# Altium PCB STM8_Project_rev_1.PcbDoc
Units mm, origin at the board's own origin, x right, y up, seen from the top; angles counter-clockwise.
Board outline 50 x 40 mm, 2 copper layers (Top Layer, Bottom Layer); 39 components, 29 nets, 126 pads, 10 vias.
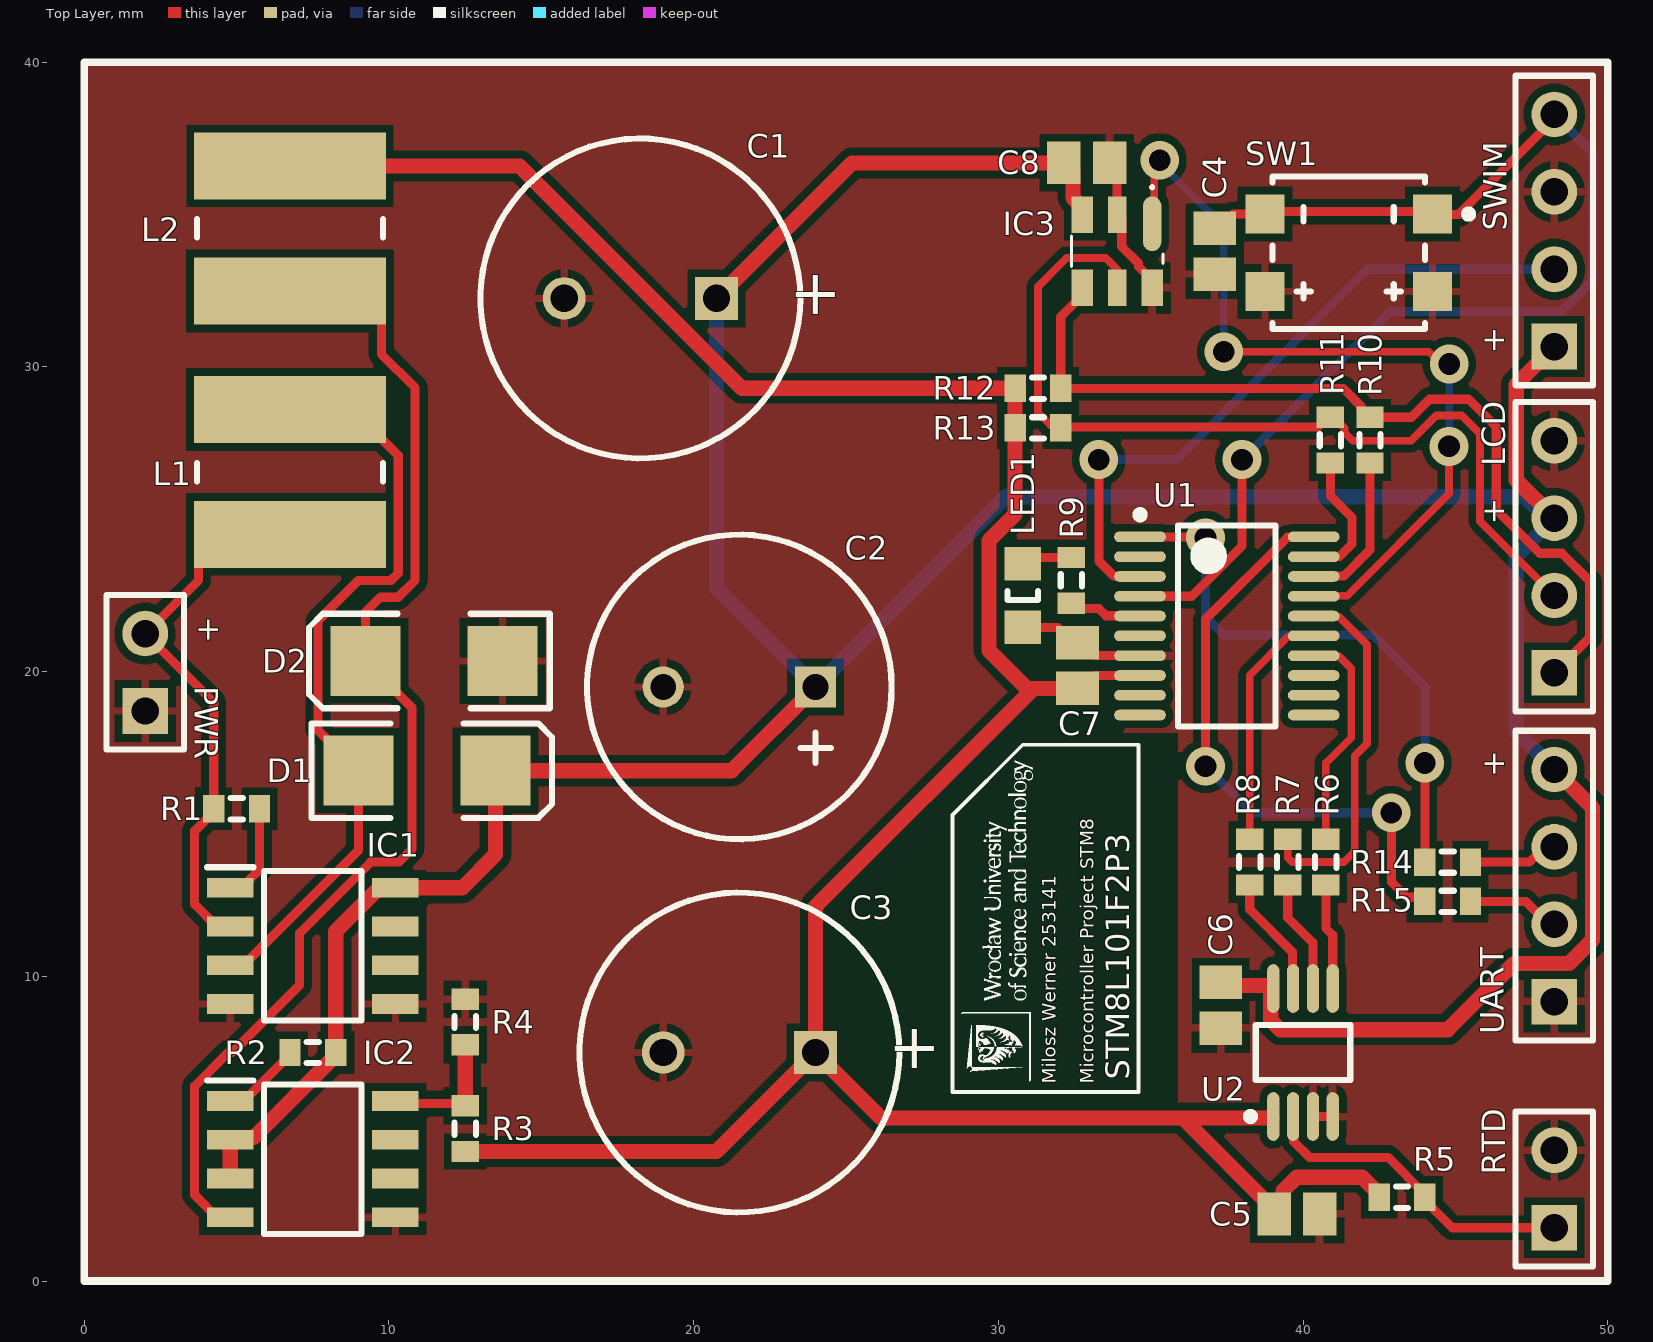
[diagram p0: Top Layer view]
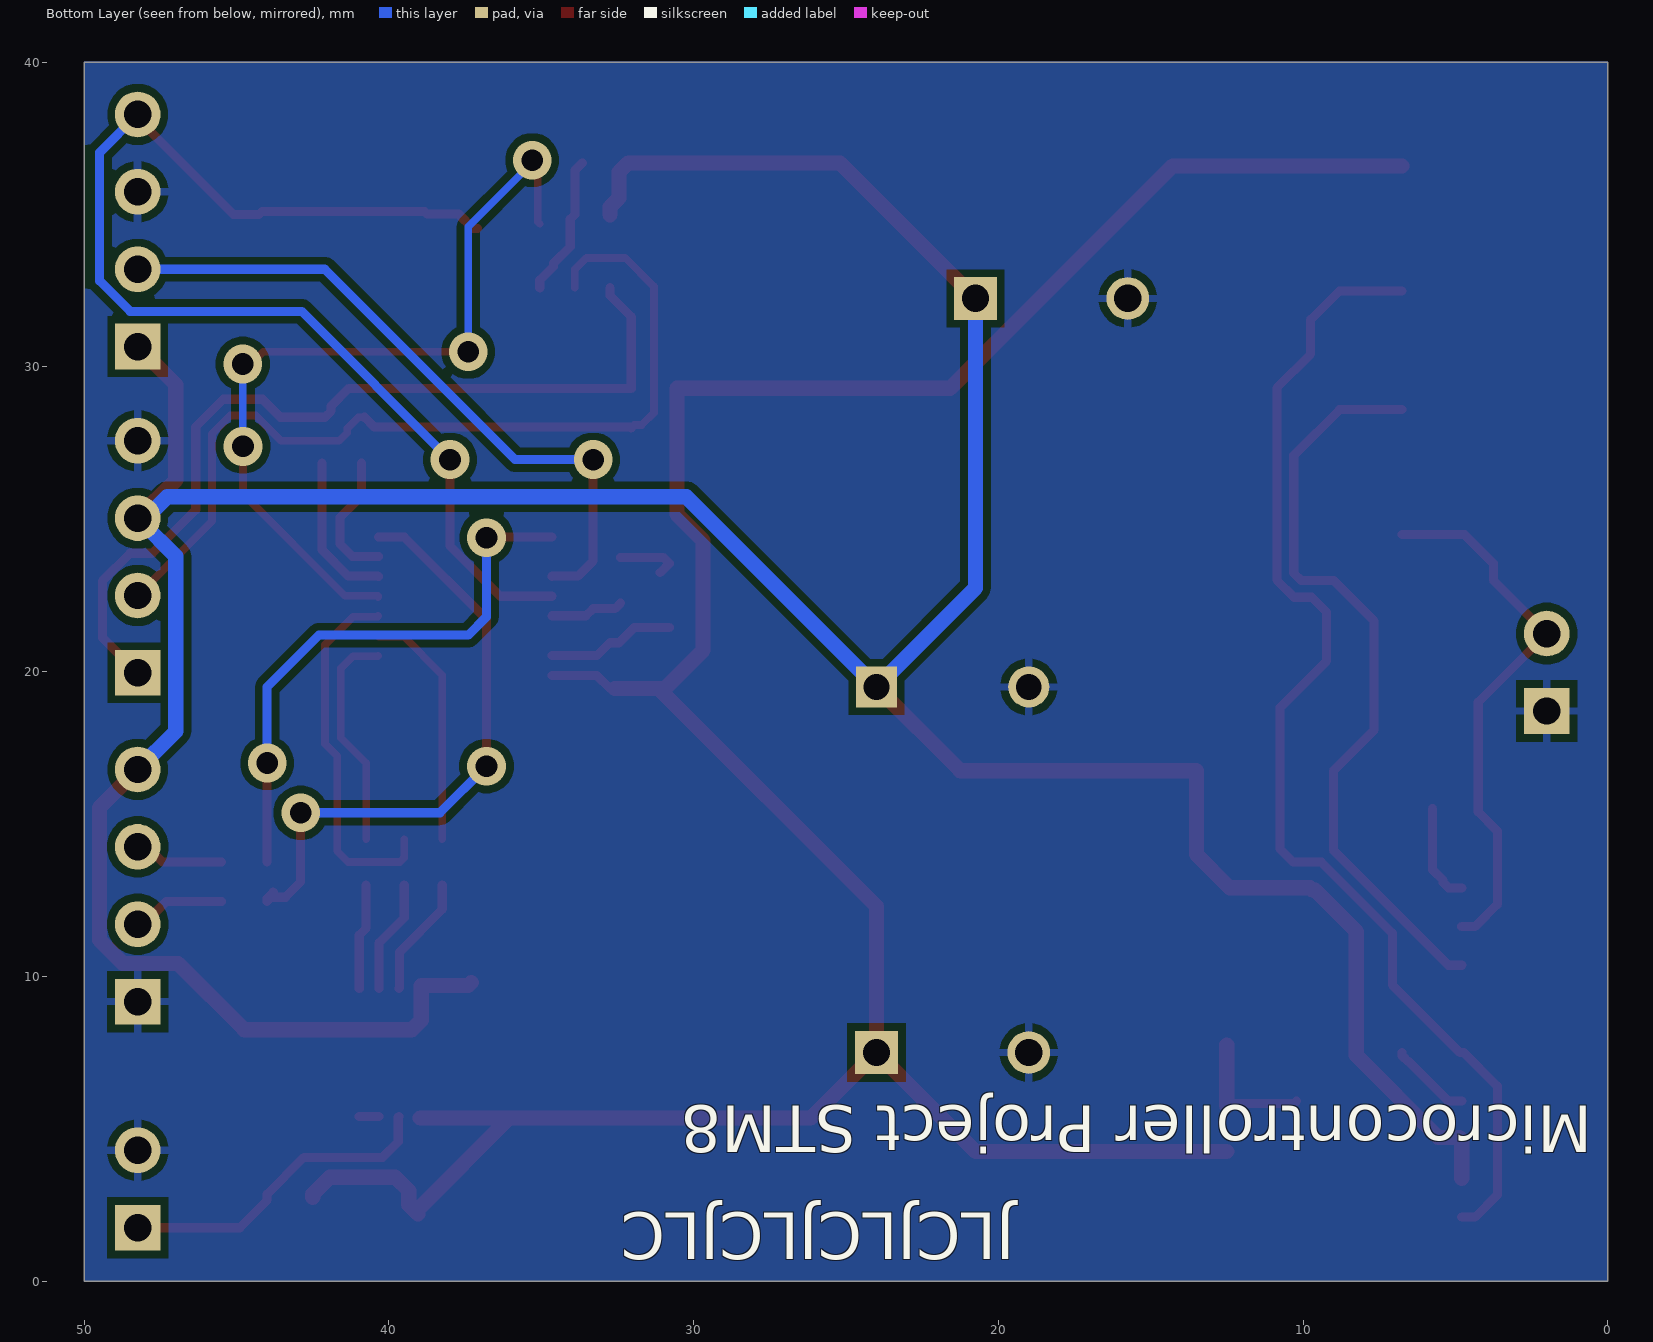
[diagram p1: Bottom Layer view, seen from below]

## Layer stack, top to bottom
Top Solder: solder mask 0.0102, Solder Resist, Dk 3.5
Top Layer: signal copper 0.0356
Dielectric 1: dielectric 0.32, FR-4, Dk 4.8
Bottom Layer: signal copper 0.0356
Bottom Solder: solder mask 0.0102, Solder Resist, Dk 3.5

## Board outline
0,0 0,40 50,40 50,0

## Design rules (kind name [scope] priority, off if disabled: settings)
Clearance [All] p1: gap=0.254 ignorepadtopadclearanceinfootprint=FALSE except(0: Arc-Hole Track-Hole SMDPad-Hole THPad-Hole Via-Hole Fill-Hole Poly-Hole Region-Hole Text-Hole)
PolygonConnect [All] p1: connectstyle=Relief reliefconductorwidth=0.254 reliefentries=4 polygonreliefangle="90 Angle" airgapwidth=0.254
RoutingVias [All] p1: holewidth=0.711 width=1.27 viastyle="Through Hole" minholewidth=0.711 minwidth=1.27 maxholewidth=0.711 maxwidth=1.27
SolderMaskExpansion [All] p1: expansion=0.102 istentingtop=FALSE
Width [All] p1: maxlimit=0.5 minlimit=0.254 preferedwidth=0.3
30 further rules are at their usual default settings.

## Classes and differential pairs
component class STM8_Project_ver_1: C1 C3 C4 C5 C6 C7 C8 D1 D2 IC1 IC2 IC3 L1 L2 LCD LED1 R1 R2 R3 R4 R5 R6 R7 R8 R9 R10 R11 R12 R13 R14 R15 RTD SW1 SWIM U1 U2

## Components (designator, comment, footprint, x,y, rotation, side; value= is the part's Value field where it differs from the comment)
C1 "EEU-FR1C102B" PNSC-EEUFM1H221-2 18.25,32.25 r180 top
C2 "UVC2G100MPD1TD" NIC-UVC2G100MPD1TD-2_V 21.5,19.5 r180 top
C3 "EEU-FR1C102B" PNSC-EEUFM1H221-2 21.5,7.5 r180 top
C4 "0805" C0805 37.1,33.8 r270 top value=100pF
C5 "0805" C0805 39.8,2.2 r0 top value=0.1uF
C6 "0805" C0805 37.3,9.05 r90 top value=1uF
C7 "0805" C0805 32.6,20.2 r90 top value=1uF
C8 "0805" C0805 32.9,36.7 r0 top value=1uF
D1 "SS13-LTP" SMB 11.25,16.75 r0 top
D2 "SS13-LTP" SMB 11.475,20.35 r180 top
IC1 "LT1110CS8-5#PBF" SOIC127P599X175-8N 7.5,11 r0 top
IC2 "LT1110CS8#PBF" SOIC127P599X175-8N 7.5,4 r0 top
IC3 "MXC6244AU" MXC6244AU 33.9,33.8 r270 top
L1 "744053470" WE-TPC-5828-LH 6.75,26.55 r90 top
L2 "744053470" WE-TPC-5828-LH 6.75,34.55 r90 top
LCD "Header 4 (LCD)" HDR1X4 48.25,19.96 r90 top (schematic designator P4)
LED1 "0805 RED" 0805_A 30.8,22.5 r90 top
PWR "Header 2" HDR1X2 2,18.71 r90 top (schematic designator P1)
R1 "0603" J1-0603 5,15.5 r0 top value="220 1%"
R2 "0603" J1-0603 7.5,7.5 r180 top value="220 1%"
R3 "0603" J1-0603 12.5,5 r270 top value=1.5K
R4 "0603" J1-0603 12.5,8.5 r90 top value=180
R5 "0603" J1-0603 43.25,2.75 r180 top value=10K
R6 "0603" J1-0603 40.75,13.75 r90 top value=1K
R7 "0603" J1-0603 39.5,13.75 r90 top value=1K
R8 "0603" J1-0603 38.25,13.75 r90 top value=1K
R9 "0603" J1-0603 32.4,23 r270 top value=1K
R10 "0603" J1-0603 42.2,27.6 r90 top value=1K
R11 "0603" J1-0603 40.9,27.6 r90 top value=1K
R12 "0603" J1-0603 31.3,29.3 r180 top value=4.7K
R13 "0603" J1-0603 31.3,28 r180 top value=4.7K
R14 "0603" J1-0603 44.75,13.75 r180 top value=1K
R15 "0603" J1-0603 44.75,12.46 r180 top value=1K
RTD "Header 2 (RTD)" HDR1X2 48.25,1.75 r90 top (schematic designator P2)
SW1 "7914G-1-000E" BOUR-7914G-1-000E_V 41.5,33.75 r270 top
SWIM "Header 4 (SWIM)" HDR1X4 48.25,30.67 r90 top (schematic designator P5)
U1 "STM8L101F2P3" TSSOP20_N 37.5,21.5 r0 top
U2 "ADS7816EB/250" TI-DGK8_N 40,7.5 r90 top
UART "Header 4 (UART)" HDR1X4 48.25,9.17 r90 top (schematic designator P3)

## Footprints (in the part's own frame and the unit in brackets; to place one, negate y for a bottom-side part, rotate by r counter-clockwise, add the part's x,y. Pads: shape width x height; smd on the part's side, far side on the other; paste and mask are expansions set on the pad)
0805_A [mm] "Chip LED, 2-Leads, Body 2.0x1.3mm, IPC Medium Density"
  rect 1.1x1.2 smd: 1(-1.05,0) 2(1.05,0)
  silkscreen extent -0.15,-0.5 0.15,0.5, body extent -1,-0.62 1,0.63, height 0.68
BOUR-7914G-1-000E_V [mm] "SMD, 4-Leads, Body 5x5mm, Height 4.49mm"
  rect 1.27x1.27 smd: 1(-1.27,2.75) 2(1.27,2.75) 3(1.27,-2.75) 4(-1.27,-2.75)
  silkscreen extent -2.5,-2.5 2.5,4.06, body extent -2.5,-3.1 2.5,3.1, height 4.11
C0805 [mm] "Chip Capacitor, Body 2.0x1.3mm, IPC High Density"
  rect 1.1x1.4 smd: 1(-0.75,0) 2(0.75,0)
  body extent -1.1,-0.72 1.1,0.72, height 1.4
HDR1X2 [mm] "Connector; Header; 2 Position"
  rect 1.5x1.5 hole 0.9: 1(0,0)
  round 1.5 hole 0.9: 2(2.54,0)
  silkscreen extent -1.27,-1.27 3.81,1.27
HDR1X4 [mm] "Connector; Header; 4 Position"
  rect 1.5x1.5 hole 0.9: 1(0,0)
  round 1.5 hole 0.9: 2(2.54,0) 3(5.08,0) 4(7.62,0)
  silkscreen extent -1.27,-1.27 8.89,1.27
J1-0603 [mm] "Chip Resistor, Body 1.6x0.8mm, IPC High Density"
  rect 0.7x0.9 smd: 1(-0.75,0) 2(0.75,0)
  silkscreen extent -0.2,-0.35 0.2,0.35, body extent -0.85,-0.48 0.85,0.48, height 0.9
MXC6244AU [mm]
  rrect100% 1.8x0.6 smd: 1(-0.9,1.15)
  rect 1.2x0.6 smd: 2(-1.2,0) 5(1.2,0)
  rect 1.2x0.7 smd: 3(-1.2,-1.15) 4(1.2,-1.15) 6(1.2,1.15)
  silkscreen extent -2.15,-1.5 0.5,1.5, body extent -1.5,-1.5 1.5,1.5, height 1.4
NIC-UVC2G100MPD1TD-2_V [mm] "2-Leads, Radial Lead 10x14.5mm,Lead-wire Diameter 0.6mm, Pin Spacing 5mm"
  rect 1.35x1.35 hole 0.85: 1(-2.5,0)
  round 1.35 hole 0.85: 2(2.5,0)
  silkscreen extent -5,-5 5,5, body extent -5,-5 5,5, height 14.5
PNSC-EEUFM1H221-2 [mm] "THD, 2-Leads, Dia 10.5mm, Body Length 17.5mm, Pin Spacing 5mm"
  rect 1.4x1.4 hole 0.9: 1(-2.5,0)
  round 1.4 hole 0.9: 2(2.5,0)
  silkscreen extent -5.25,-5.25 5.25,5.25, body extent -5.25,-5.25 5.25,5.25, height 17.5
SMB [mm] "DO-214-AA/SMB; 2 C-Bend Leads; Body 5.3 x 3.6 mm, inc. leads (LxW)"
  rect 2.3x2.3 smd: 1(-2.25,0) 2(2.25,0)
  silkscreen extent -3.8,-1.55 4.1,1.55
SOIC127P599X175-8N [mm]
  rect 1.526x0.65 smd: 1(-2.712,1.905) 2(-2.712,0.635) 3(-2.712,-0.635) 4(-2.712,-1.905) 5(2.712,-1.905) 6(2.712,-0.635) 7(2.712,0.635) 8(2.712,1.905)
  silkscreen extent -3.47,-2.45 1.6,2.58, body extent -3,-2.45 3,2.45, height 1.75
TI-DGK8_N [mm] "SOP, 8-Leads, Body 3x3mm, Pitch 0.65mm, IPC Medium Density"
  oval 1.6x0.4 smd: 1(-2.1,0.975) 2(-2.1,0.325) 3(-2.1,-0.325) 4(-2.1,-0.975) 5(2.1,-0.975) 6(2.1,-0.325) 7(2.1,0.325) 8(2.1,0.975)
  silkscreen extent -2.22,-1.55 0.9,1.85, body extent -1.55,-1.55 1.55,1.55, height 1.1
TSSOP20_N [mm] "TSOP, 20-Leads, Body 6.5x4.4mm, Pitch 0.65mm, IPC Medium Density"
  oval 1.7x0.35 smd: 1(-2.85,2.925) 2(-2.85,2.275) 3(-2.85,1.625) 4(-2.85,0.975) 5(-2.85,0.325) 6(-2.85,-0.325) 7(-2.85,-0.975) 8(-2.85,-1.625) 9(-2.85,-2.275) 10(-2.85,-2.925) 11(2.85,-2.925) 12(2.85,-2.275) 13(2.85,-1.625) 14(2.85,-0.975) 15(2.85,-0.325) 16(2.85,0.325) 17(2.85,0.975) 18(2.85,1.625) 19(2.85,2.275) 20(2.85,2.925)
  silkscreen extent -2.97,-3.3 1.6,3.77, body extent -2.25,-3.3 2.25,3.3, height 1.2
WE-TPC-5828-LH [mm] "SMD Inductor, 2-Leads, Body 5.8 x 5.8 mm"
  rect 2.2x6.3 smd: 1(-2.05,0) 2(2.05,0)
  silkscreen extent -0.3,-3.05 0.3,3.05, body extent -2.9,-2.9 2.9,2.9, height 2.79

## Part data
C1 C3: library part CMP-2000-05313-1, "Aluminum Electrolytic Capacitor, 1000 uF, +/- 20%, 16 V, -40 to 105 degC, 2-Pin THD, RoHS, Tape and Reel", Capacitance=1000µF, Case Size/Dimension=Ø10x16mm, Lifetime@Temperature=8000Hrs@105degC, Manufacturer=Panasonic, Operating Temp Range=-40to+105degC, Operating Temp-Max=105degC, Rated Voltage=16V, Ripple Current=1790mA, Datasheet URL=http://www.produktinfo.conrad.com/datenblaetter/425000-449999/446746-da-01-en-ALU_KONDENSATOR_FR_R_1000_UF_16V.pdf, Datasheet Version=Nov-11, Impedance=0.028O, Manufacturer URL=http://www.panasonic.com/, Series=FR, Type=Radial
C2: library part CMP-0743-00001-1, "Aluminum Electrolytic Capacitor, High Voltage, Ultra-Miniature-Sized for adapters, Polar, 400 V, 10uF, +/-20% Tolerance, -40 to 105 degC, 10 x 12.5 mm D X L, RoHS, Bulk", Capacitance Tolerance="+/- 20%", Category Temperature Range="-40 to 105 degC", Leakage Current (Short Term)="260 mA", Manufacturer=Nichicon, Rated Capacitance Range="10 uF", Rated Ripple Current (at 100kHz)="150 mA", Rated Ripple Current (at 120Hz)="100 mA", Rated Voltage="400 V", ComponentLink1Description="Manufacturer URL", ComponentLink1URL=http://www.nichicon.co.jp/, ComponentLink2Description=Datasheet, ComponentLink2URL=http://nichicon-us.com/english/products/pdfs/e-vc.pdf, ComponentLink3Description="Package Specification", ComponentLink3URL=http://nichicon-us.com/english/products/pdfs/e-vc.pdf, DatasheetVersion=Sep-13, Diameter="10 mm", Length="12.5 mm", Mounting Technology="Through Hole", PackageDescription="2-Pin Radial Lead 10 x 12.5 mm, Lead-wire Diameter 0.6 mm, Pin Spacing 5 mm", PackageReference=UVC2G100MPD1TD-2, PackageVersion=Sep-13, Packing=Bulk, PartNumber=UVC2G100MPD1TD, RoHS=TRUE, Series=VC
C4 C5 C6 C7 C8: library part Cap, "Capacitor", LatestRevisionDate=17-Jul-2002, LatestRevisionNote="Re-released for DXP Platform.", PackageDescription="Radial Cap, Thru-Hole; 2 Leads; 0.3 in Pin Spacing", PackageReference=RAD-0.3, Published=8-Jun-2000, Publisher="Altium Limited"
D1 D2: library part "D Schottky", "Schottky Diode", Code_JEDEC=DO-214-AA, LatestRevisionDate=17-Jul-2002, LatestRevisionNote="Re-released for DXP Platform.", PackageDescription="DO-214-AA/SMB; 2 C-Bend Leads; Body 5.3 x 3.6 mm, inc. leads (LxW)", PackageReference=SMB, Published=8-Jun-2000, Publisher="Altium Limited"
IC1: "Switching Voltage Regulators Micropower DC-DC Converter Fixed 5V", Manufacturer_Name="Linear Technology", Supplier Part Number 1=584-LT1110CS8-5#PBF, Datasheet Link=https://www.analog.com/media/en/technical-documentation/data-sheets/lt1110.pdf, Height=1.752mm, Manufacturer_Part_Number=LT1110CS8-5#PBF, Supplier 1=Mouser
IC2: "Switching Voltage Regulators Micropower DC-DC Converter Adjustable and Fixed 5V, 12V", Manufacturer_Name="Linear Technology", Mouser Part Number=584-LT1110CS8#PBF, Datasheet Link=https://www.analog.com/media/en/technical-documentation/data-sheets/lt1110.pdf, Height=1.752mm, Manufacturer_Part_Number=LT1110CS8#PBF, Mouser Price/Stock=https://www.mouser.com/Search/Refine.aspx?Keyword=584-LT1110CS8%23PBF, Supplier 1=Mouser, Supplier Part Number 1=584-LT1110CS8#PBF
IC3: "Accelerometers +/- 8g Complete 2 Axis Accelerometer System with Programmable Internal anti-vibration Filter", Manufacturer_Name=MEMSIC, Mouser Part Number=438-MXC6244AU, Datasheet Link=https://componentsearchengine.com/Datasheets/1/MXC6244AU.pdf, Height=1.3mm, Manufacturer_Part_Number=MXC6244AU, Mouser Price/Stock=https://www.mouser.co.uk/ProductDetail/MEMSIC/MXC6244AU?qs=uBbGm2YIKJILg44aLNvpFw%3D%3D, Supplier 1=Mouser, Supplier Part Number 1=438-MXC6244AU
L1 L2: library part CMP-0227-00413-1, "SMD Shielded Tiny Power Inductor WE-TPC, L = 47.0 µH", Inductance="47.0 ÂµH", ComponentLink1Description="Manufacturer Link", ComponentLink1URL=http://www.we-online.com, ComponentLink2Description=Datasheet, ComponentLink2URL=http://www.we-online.de/katalog/media/pdf/744053470.pdf, DatasheetVersion="ver 6, Aug-2010", PackageDescription="SMD Inductor, 2-Leads, Body 5.8 x 5.8 mm", PackageReference=WE-TPC-5828-LH, PackageVersion=2010
LCD SWIM UART: library part "Header 4", "Header, 4-Pin", LatestRevisionDate=17-Jul-2002, LatestRevisionNote="Re-released for DXP Platform.", Publisher="Altium Limited"
LED1: library part CMP-1426-00010-1, "SMD mono-color Chip LED, WL-SMCW, Super Red", Color="Super Red", Manufacturer="Wuerth Elektronik", PartNumber=150080SS75000, ComponentLink1Description="Manufacturer URL", ComponentLink1URL=http://www.we-online.com, ComponentLink2Description=Datasheet, ComponentLink2URL=http://katalog.we-online.com/led/datasheet/150080SS75000.pdf, PackageReference=0805_A
PWR: "Header, 2-Pin", LatestRevisionDate=17-Jul-2002, LatestRevisionNote="Re-released for DXP Platform.", Publisher="Altium Limited"
R1 R2 R3 R4 R5 R6 R7 R8 R9 R10 R11 R12 R13 R14 R15: library part Res3, "Resistor", LatestRevisionDate=29-May-2009, LatestRevisionNote="IPC-7351 Footprint Added.", PackageDescription="Chip Resistor", PackageReference=J1-0603, Published=8-Jun-2000, Publisher="Altium Limited"
RTD: library part "Header 2", "Header, 2-Pin", LatestRevisionDate=17-Jul-2002, LatestRevisionNote="Re-released for DXP Platform.", Publisher="Altium Limited"
SW1: library part CMP-2000-05692-1, "SPST Gull Wing Sealed Key Switch, 100 mA, 16 V, -55 to 125 degC, 4-Pin SMD, RoHS, Tape and Reel", Actuator Color=N/A, Contact Rating @ Voltage=0.1A, Dielectric Strength=250VAC, Manufacturer=Bourns, Maximum AC Voltage Rating=16V, Maximum Contact Resistance=100mOhm, Minimum Insulation Resistance=100MOhm, Operating Force=2.94N, Operating Temperature=-55to125C, Package Description="4-Pin Surface Mount Device, Body 5 x 5 mm, Height 4.49 mm", Actuator Length=1.65mm, Actuator Style=RoundButton, Base Material=Thermoplastic, Body Orientation=Straight, Contact Material=Gold, Contact Plating=N/A, COO=TW, Datasheet URL=http://www.bourns.com/docs/Product-Datasheets/7914.pdf, Datasheet Version=08/2016, Dimension=5x6.2x4.19mm, ECCN=EAR99, Electrical Life=N/A, Family=7914, Ground Terminal=No, Housing Material=N/A, HTS=8536509065, Illumination Type=N/R, Manufacturer URL=http://www.bourns.com/, Maximum DC Voltage Rating=16V, Mechanical Life=100000Cycles, Mounting=SurfaceMount,GullWing, Mounting Technology=SurfaceMount, Package Reference=7914G-1-000E, Packaging=EmbossedTapeandReel, Part No=7914G-1-000E, Pole Throw Configuration=SPST, Product Weight=N/A, RoHS=Yes, Seal Description=N/A, Seal Location=N/A, Supplier=Bourns, Switch Configuration=N.O., Type=KeySwitch
U1: library part CMP-0235-00079-1, "STM8L ARM-based EnergyLite 8-bit MCU, 4 kB Flash, 1.5 kB Internal RAM, -40 to +85°C Temperature, 20-pin TSSOP, Tube", ComponentLink1Description="STM8L101 Datasheet", ComponentLink1URL=http://www.st.com/internet/com/TECHNICAL_RESOURCES/TECHNICAL_LITERATURE/DATASHEET/CD00220591.pdf, ComponentLink2Description="STM8L Family Web Page", ComponentLink2URL=http://www.st.com/internet/mcu/subclass/1381.jsp, ComponentLink3Description="st.com Home", ComponentLink3URL=http://www.st.com/internet/com/home/home.jsp, PackageDescription="20-Pin Thin Shrink Small Package Outline 0.65 mm Pitch", PackageReference=TSSOP20, PackageVersion=2010
U2: library part CMP-0003-00360-2, "12-Bit High Speed Micro Power Sampling ADC, -40 to 85 degC, 8-pin SOP (DGK8), Green (RoHS & no Sb/Br)", Analog Voltage AV/DD(Max)(V)=5.25, Analog Voltage AV/DD(Min)(V)=4.5, Manufacturer="Texas Instruments", # Input Channels=1, Architecture=SAR, Code_JEDEC=MO-187, ComponentLink1Description="Manufacturer URL", ComponentLink1URL=http://www.ti.com/, ComponentLink2Description=Datasheet, ComponentLink2URL=http://www.ti.com/general/docs/lit/getliterature.tsp?genericPartNumber=ADS7816&fileType=pdf, ComponentLink3Description="Package Specification", ComponentLink3URL=http://www.ti.com/litv/pdf/mpds028d, DatasheetVersion=SBAS061, Digital Supply(Max)(V)=5.25, Digital Supply(Min)(V)=4.75, Eco-Plan="Green (RoHS & no Sb/Br)", INL(Max)(+/-LSB)=2, Interface="Serial SPI", Mounting Technology="Surface Mount", PackageDescription="8-Pin Thin Small Outline, Body 3 x 3 mm, Pitch 0.65 mm", PackageReference=DGK8, PackageVersion="4073329/E, 05/2006", PartNumber=ADS7816EB/250, Resolution(Bits)=12, Sample Rate (max)(SPS)=200k, SFDR(dB)=86, SINAD(dB)=72, SubFamily="Precision ADC (<=10MSPS)"

## Via types
v1: diameter 1.27, hole 0.711, Top Layer to Bottom Layer, 10 vias

## Nets (pads, with @x,y where several pads share a name; then routed paths per layer and width w, separated by ;. In a path a pad name is that pad's centre, name@x,y a point inside that pad or via, vN(x,y) a via of type N, cw(c..) or ccw(c..) an arc to the next point about the centre after c; other vN are vias at no path point)
+2.1: C3.1 C5.1 C7.1 L2.2 R3.2 R5.2 R12.2 R13.2 U1.8 U2.1 | length 94
  Top Layer w0.3: C7.1 32.75,19.45 33.175,19.875 U1.8
  Top Layer w0.5: L2.2 14.287,36.6 21.587,29.3 R12.2 R13.2 30.55,25.163 29.696,24.309 29.696,20.691 30.937,19.45 31.15,19.45 ; R3.2 20.75,4.25 C3.1 ; C7.1 31.15,19.45 ; U2.1@38.971,5.346 36.054,5.346 ; R5.2 42.5,2.85 41.946,3.404 39.791,3.404 39.35,2.963 39.35,2.5 C5.1 39.05,2.35 36.054,5.346 ; C3.1 24,12.3 31.15,19.45 ; C3.1 26.154,5.346 36.054,5.346
+5: C1.1 C2.1 C6.2 C8.1 D1.2 IC1.8 IC2.2 IC2.3 IC3.3 LCD.3 R2.1 SWIM.1 U2.8 UART.4 | length 123.8
  Top Layer w0.5: IC2.3 IC2.2 4.863,4.71 5.56,4.71 8.25,7.4 8.25,11.474 9.606,12.83 9.699,12.83 9.774,12.905 12.405,12.905 13.5,14 D1.2 21.25,16.75 C2.1 ; C1.1 25.2,36.7 C8.1 32.45,36.4 32.45,35.55 32.75,35.25 IC3.3 ; C6.2 37.4,9.7 U2.8@38.938,9.7 ; U2.8@38.944,9.661 38.944,8.556 39.25,8.25 44.75,8.25 46.924,10.424 48.737,10.424 49.504,11.191 49.504,15.536 UART.4 ; LCD.3 46.996,26.294 46.996,28.496 47,28.5 47,29.42 SWIM.1
  Bottom Layer w0.5: C1.1 20.75,22.75 C2.1 30.239,25.739 47.28,25.739 47.979,25.04 LCD.3 48.115,24.905 46.996,23.786 46.996,18.044 UART.4
GND: C1.2 C2.2 C3.2 C4.2 C5.2 C6.1 C7.2 C8.2 D2.1 IC1.4 IC1.5 IC2.5 IC3.2 IC3.6 LCD.4 LED1.1 PWR.1 R4.2 RTD.2 SW1.2 SW1.3 SWIM.3 U1.7 U2.3 U2.4 UART.1 | length 9.6
  Top Layer w0.3: LED1.1 31.95,21.45 32.45,20.95 C7.2 32.75,20.95 33.175,20.525 U1.7 ; C8.2 33.9,36.45 IC3.2 34.05,34.85 34.05,33.95 34.604,33.396 34.604,33.296 35.05,32.85 IC3.6 ; U2.3 U2.4
NetD1_1: D1.1 IC1.3 L1.2 | length 25.2
  Top Layer w0.3: IC1.3 5.226,10.365 6.7,11.84 9,14.139 D1.1 7.671,18.079 7.671,21.667 9,22.996 10.067,22.996 10.304,23.233 10.304,27.096 8.8,28.6 L1.2
NetD2_2: D2.2 IC2.4 L2.1 | length 39.3
  Top Layer w0.3: IC2.4 4.35,2.095 3.621,2.824 3.621,6.397 4.724,7.5 4.852,7.5 7.067,9.715 7.067,11.419 9.398,13.75 10.324,13.75 10.75,14.176 10.75,18.825 D2.2 9.225,21.95 9.717,22.442 10.297,22.442 10.858,23.003 10.858,29.313 9.75,30.421 9.75,31.55 8.8,32.5 L2.1
NetIC1_1: IC1.1 R1.2 | length 3.3
  Top Layer w0.3: IC1.1 5.226,12.905 5.401,13.08 5.401,13.151 5.75,13.5 R1.2
NetIC1_2: IC1.2 L1.1 PWR.2 R1.1 | length 18
  Top Layer w0.3: IC1.2 4.35,11.635 3.621,12.364 3.621,14.771 4.25,15.4 R1.1 4.25,19 PWR.2 3.75,23 3.75,23.55 4.7,24.5 L1.1
NetIC2_1: IC2.1 R2.2 | length 2.7
  Top Layer w0.3: IC2.1 5.226,5.905 6.521,7.2 6.55,7.2 6.75,7.4 R2.2
NetIC2_8: IC2.8 R3.1 R4.1 | length 4.4
  Top Layer w0.3: IC2.8 10.289,5.828 12.422,5.828 R3.1
  Top Layer w0.5: R3.1 R4.1
NetIC3_1: IC3.1 U1.17 | length 27
  Top Layer w0.254: IC3.1 35.116,34.766 35.116,36.605 v1(35.3,36.789) ; v1(37.4,30.5) 44.125,30.5 44.525,30.1 v1(44.8,30.1) ; U1.17@40.35,22.45 U1.17 40.368,22.493 41.447,22.493 44.793,25.84 v1(44.793,27.393)
  Bottom Layer w0.254: v1(35.3,36.789) 35.3,36.7 37.4,34.6 v1(37.4,30.5) ; v1(44.793,27.393) 44.797,27.397 44.797,30.097 v1(44.8,30.1)
NetIC3_4: IC3.4 LCD.1 R10.2 R12.1 | length 29.2
  Top Layer w0.3: IC3.4 32.75,32.35 32.05,31.65 R12.1 41.321,29.3 41.9,28.721 41.9,28.55 42.1,28.35 R10.2 43.562,28.35 44.153,28.94 45.434,28.94 46.342,28.033 46.342,25.316 47.772,23.886 48.496,23.886 49.404,22.978 49.404,21.114 LCD.1
NetIC3_5: IC3.5 LCD.2 R11.2 R13.1 | length 30.1
  Top Layer w0.254: R13.1 31.95,28.1 31.7,28.1 31.3,28.5 31.3,32.639 32.242,33.581 33.519,33.581 33.9,33.2 IC3.5 ; R11.2@40.8,28.35 R11.2 41,28.35 41.369,27.981 41.369,27.842 41.63,27.581 43.544,27.581 44.373,28.409 45.214,28.409 45.811,27.813 45.811,24.939 LCD.2
  Top Layer w0.3: R13.1 32.075,28.025 40.475,28.025 R11.2@40.8,28.35
NetLED1_2: LED1.2 R9.1 | length 2.1
  Top Layer w0.3: LED1.2@31.1,23.25 LED1.2 31,23.75 R9.1
NetP2_1: R5.1 RTD.1 U2.2 | length 10.7
  Top Layer w0.3: U2.2 39.694,5.381 39.694,4.577 40.213,4.058 42.792,4.058 44,2.85 R5.1 44,2.65 44.9,1.75 RTD.1
NetP3_2: R15.1 UART.2 | length 3.1
  Top Layer w0.3: R15.1 47.303,12.46 48.053,11.71 UART.2
NetP3_3: R14.1 UART.3 | length 3
  Top Layer w0.3: R14.1 47.425,13.75 47.925,14.25 UART.3
NetP5_2: SWIM.2 U1.3 | length 22.4
  Top Layer w0.3: v1(33.3,26.961) 33.3,23.631 33.797,23.135 34.64,23.135 U1.3
  Bottom Layer w0.3: v1(33.3,26.961) 35.861,26.961 42.11,33.21 SWIM.2
NetR6_1: R6.1 U2.5 | length 3.5
  Top Layer w0.3: R6.1 40.75,12 40.75,11.579 40.975,11.354 U2.5
NetR6_2: R6.2 U1.14 | length 7.4
  Top Layer w0.254: U1.14 40.368,20.507 41.18,20.507 41.581,20.105 41.581,19.876 41.581,17.83 40.75,16.999 R6.2
NetR7_1: R7.1 U2.6 | length 3.7
  Top Layer w0.3: R7.1 39.5,11.926 40.325,11.101 U2.6
NetR7_2: R7.2 U1.16 | length 12.1
  Top Layer w0.254: R7.2 39.5,13.899 39.649,13.75 41.339,13.75 41.7,14.111 41.7,17.23 42.1,17.63 42.1,20.886 41.18,21.807 40.368,21.807 U1.16
NetR8_1: R8.1 U2.7 | length 4
  Top Layer w0.3: R8.1 38.25,12.2 39.656,10.794 39.656,9.619 U2.7
NetR8_2: R8.2 U1.15 | length 8
  Top Layer w0.254: R8.2 38.25,19.886 39.52,21.157 40.332,21.157 U1.15
NetR9_2: R9.2 U1.5 | length 2.4
  Top Layer w0.3: R9.2 32.579,22.071 33.3,22.071 33.537,21.835 34.64,21.835 U1.5
NetR10_1: R10.1 U1.18 | length 5.1
  Top Layer w0.3: U1.18 40.36,23.135 41.337,23.135 42.2,23.998 R10.1
NetR11_1: R11.1 U1.19 | length 4.4
  Top Layer w0.3: U1.19 40.36,23.785 41.203,23.785 41.604,24.185 41.604,25.066 40.9,25.77 R11.1
NetR14_2: R14.2 U1.1 | length 18.7
  Top Layer w0.3: U1.1 34.66,24.415 36.785,24.415 v1(36.8,24.4) ; R14.2 v1(44,17)
  Bottom Layer w0.3: v1(36.8,24.4) 36.8,21.8 37.4,21.2 42.3,21.2 44,19.5 v1(44,17)
NetR15_2: R15.2 U1.20 | length 20.2
  Top Layer w0.3: v1(36.8,16.9) 36.8,21.719 39.497,24.415 40.34,24.415 U1.20 ; v1(42.9,15.369) 42.9,13.1 43.402,12.598 43.862,12.598 R15.2 44,12.56 R15.2@43.8,12.76
  Bottom Layer w0.3: v1(36.8,16.9) 38.331,15.369 v1(42.9,15.369)
RESET: C4.1 SW1.1 SW1.4 SWIM.4 U1.4 | length 39.6
  Top Layer w0.3: U1.4 36.344,22.475 38,24.131 v1(38,26.961) ; C4.1 37.25,34.55 37.72,35.02 SW1.4 38.83,35.1 44.17,35.1 44.27,35 45.1,35 48.25,38.15 SWIM.4
  Bottom Layer w0.3: v1(38,26.961) 42.863,31.824 48.496,31.824 49.5,32.828 49.5,37.04 SWIM.4
pads on no net: IC1.6 IC1.7 IC2.6 IC2.7 U1.2 U1.6 U1.9 U1.10 U1.11 U1.12 U1.13

## Polygon pours and split planes (outlines as drawn)
GND on Top Layer "GND_TOP" (solid, pour order 12): 0,40 50,40 50,0 0,0
GND on Top Layer "GND_TOP" (solid, shelved, pour order 0): 0,40 50,40 50,0 0,0
GND on Bottom Layer "GND_BOT" (solid, pour order 11): 0,40 50,40 50,0 0,0
GND on Bottom Layer "GND_BOT" (solid, shelved, pour order 1): 0,40 50,40 50,0 0,0

## Other copper
Top Layer:
  pour cut-out: 26.373,5.746 35.9,5.746 35.9,8.1 35.9,18 33.985,18 33.192,18.792 31.8,18.792 31.3,18.792 30.546,18.039 24.46,12.033 24.46,8.4 24.9,8.4 24.9,7.219

## Silkscreen, mask and mechanical layers (free items; w line width, h text height)
Top Overlay:
  drawing of 56 lines, arcs and shapes, not listed
  text "+" at 46.6,30.427 h0.76 r90
  text "+" at 46.6,24.827 h0.76 r90
  text "+" at 4.4,20.927 h0.76 r90
  text "+" at 46.6,16.527 h0.76 r90
  text "STM8L101F2P3" at 34.3,6.6 h0.76 r90
  text "Milosz Werner 253141" at 32.026,6.473 h0.76 r90
  text "Microcontroller Project STM8" at 33.284,6.473 h0.76 r90
Bottom Overlay:
  text "Microcontroller Project STM8" at 0.5,5.75 h1.52 r180
  text "JLCJLCJLCJLC" at 19.454,2.246 h1.52 r180

## Dimensions
0,40 to 50,40 on Mechanical 15
0,0 to 0,40 on Mechanical 15

## Text inside footprints (layer, text, board x,y; h text height)
C1: Top Overlay "+" at 24.854,33.012 h1.5 r180
C3: Top Overlay "+" at 28.104,8.262 h1.5 r180